# Altium PCB Apollo_Main_Board_1 8.PcbDoc (part 4 of 4)
Units mil, origin at the board's own origin, x right, y up, seen from the top; angles counter-clockwise.
Board outline 984.25 x 629.92 mil, 6 copper layers (Top, Inner Layer 2, Inner Layer 3, Inner Layer 4, Inner Layer 5, Bottom), stack 5.16 mil thick; 125 components, 112 nets, 514 pads, 2007 vias.
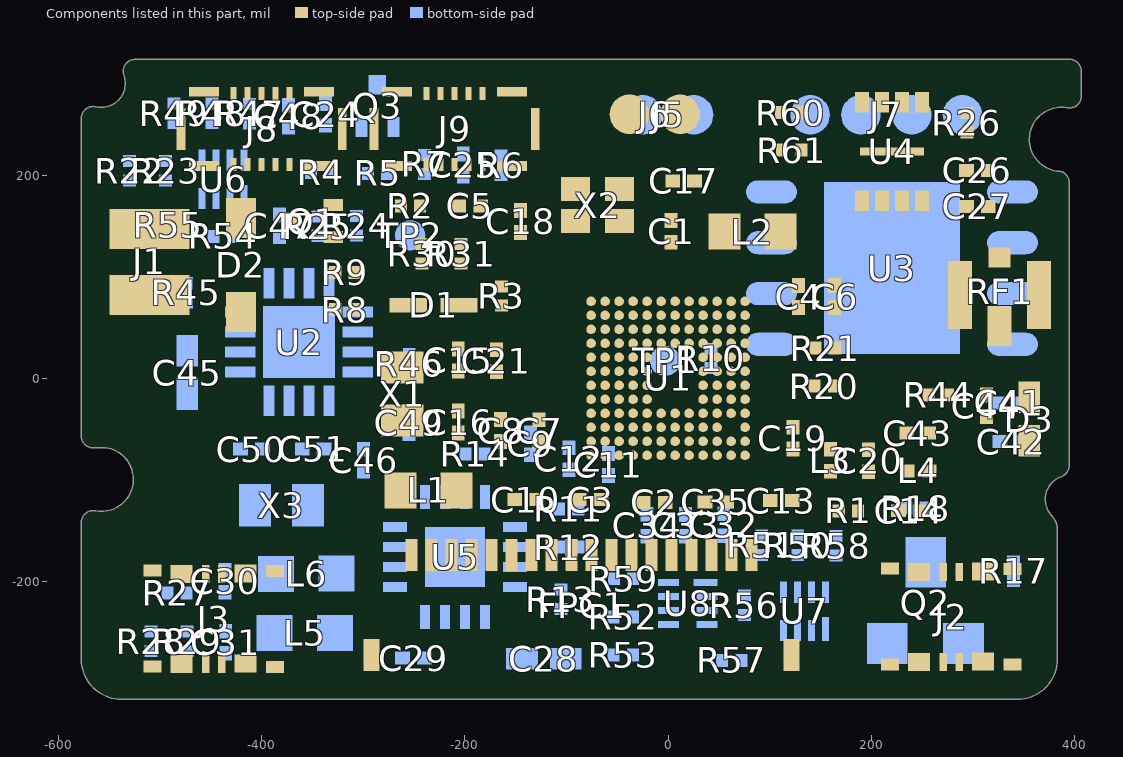
[diagram p8: the components of this part, seen from the top]

## Other copper (continued)
Bottom:
  region net VCC_3V3: -242.13,-250 -216.54,-250 -216.54,-255.91 -131.89,-255.91 -131.89,-303.15 -190.94,-303.15 -206.69,-287.4 -242.13,-287.4 -242.13,-250
  region net SW2_VDD1V9: -206.69,297.24 -135.83,297.24 -135.83,248.03 -206.69,248.03 -206.69,297.24
  region net VCC_3V3: -437.01,299.21 -366.14,299.21 -366.14,263.78 -437.01,263.78 -437.01,299.21
  region net SW2_VDD1V9: -480.32,-204.72 -462.6,-204.72 -462.6,-253.94 -480.32,-253.94 -480.32,-204.72
  region net SW2_VDD1V9: 289.37,240.16 289.37,289.37 294.29,294.29 328.74,294.29 328.74,240.16 289.37,240.16
  region net SW2_VDD1V9: -370.08,139.76 -370.08,179.13 -289.37,179.13 -277.56,190.94 -277.56,253.94 -251.97,253.94 -251.97,198.82 -238.19,198.82 -238.19,183.07 -141.73,183.07 -141.73,251.97 -100.39,251.97 -100.39,177.17 -131.89,145.67 -198.82,145.67 -198.82,-45.28 -240.16,-45.28 -240.16,-35.43 -263.78,-35.43 -263.78,5.91 -228.35,5.91 -228.35,147.64 -246.06,165.35 -291.34,165.35 -302.17,154.53 -356.3,154.53 -356.3,141.73 -363.19,134.84 -372.05,134.84 -372.05,139.76 -370.08,139.76
  region net NETQ2_1: 303.15,-194.88 340.55,-194.88 340.55,-212.6 311.02,-242.13 311.02,-271.65 279.53,-271.65 279.53,-218.5 303.15,-194.88
  region net SW2_VDD1V9: 131.89,-51.18 220.47,-51.18 220.47,-9.84 248.03,-9.84 248.03,-84.65 196.85,-84.65 196.85,-96.46 47.24,-96.46 47.24,-53.15 131.89,-53.15 131.89,-51.18
  region net SW2_VDD1V9: -330.71,-7.87 -250,-7.87 -250,-29.53 -330.71,-29.53 -330.71,-7.87

## Silkscreen, mask and mechanical layers (free items; w line width, h text height)
Silkscreen Top:
  circle w2.95: c-114.17,-92.52 r7.1
  circle w2.95: c250,293.31 r8.35
  lines w0.1: 102.06,-203.22 112.06,-188.22 122.06,-203.22 102.06,-203.22
  text "-" at -466.54,291.34 h19.68
  text "+" at -352.36,289.37 h19.68
  text "-" at -273.62,289.37 h19.68
  text "+" at -159.45,289.37 h19.68
  text "RX" at -114.17,240.16 h19.68
  text "TX" at 51.18,240.16 h19.68
  text "1" at -452.76,169.29 h19.68
  text "1" at -295.28,165.35 h19.68
  text "1" at -458.66,-171.26 h19.68
  text "1" at 267.72,-173.23 h19.68
  text "18" at -336.61,-175.2 h19.68
  text "1" at 147.64,-188.98 h19.68
Silkscreen Bottom:
  text "GND" at 147.64,212.6 h13.78
  text "CLK" at 208.66,210.63 h15.75
  text "DID" at 257.87,210.63 h15.75
  text "VDD" at 322.83,210.63 h15.75
  text "RST" at -35.43,179.13 h17.72 r270
  text "GND" at 13.78,177.17 h17.72 r270
  text "Apollo_Main_Board_V1" at 55.12,76.77 h17.72
Solder Mask Top:
  region: 448.4,236.22 ccw(c393.7,236.22) 393.7,290.92 ccw(c393.7,236.22) 339.01,236.22 ccw(c393.7,236.22) 393.7,181.53 ccw(c393.7,236.22)
  region: -496.49,-98.43 ccw(c-551.18,-98.43) -551.18,-43.73 ccw(c-551.18,-98.43) -605.88,-98.43 ccw(c-551.18,-98.43) -551.18,-153.12 ccw(c-551.18,-98.43)
  region: -494.52,287.4 ccw(c-549.21,287.4) -549.21,342.1 ccw(c-549.21,287.4) -603.91,287.4 ccw(c-549.21,287.4) -549.21,232.71 ccw(c-549.21,287.4)
Solder Mask Bottom:
  region: -502.74,289.37 ccw(c-562.99,289.37) -562.99,349.63 ccw(c-562.99,289.37) -623.25,289.37 ccw(c-562.99,289.37) -562.99,229.11 ccw(c-562.99,289.37)
  region: -490.92,-100.39 ccw(c-551.18,-100.39) -551.18,-40.14 ccw(c-551.18,-100.39) -611.44,-100.39 ccw(c-551.18,-100.39) -551.18,-160.65 ccw(c-551.18,-100.39)
  region: 291.34,-92.52 397.64,-92.52 397.64,-149.61 291.34,-149.61 291.34,-92.52
Mechanical 1:
  circle w0.5: c394.96,-154.45 r11.81
  lines w0.5: -563.53,-130.31 -563.53,-130.31 ; -535.53,298.3 -535.53,298.3 ; 382.83,204.1 382.87,204.1 382.83,204.1 ; 392.81,266.28 392.81,266.28
Mechanical 5:
  circle w0.5: c394.89,-154.55 r11.81
  lines w0.5: -563.11,267.3 -563.11,267.3 ; -535.59,298.2 -535.59,298.2 ; 382.77,204 382.8,204 382.77,204 ; 392.75,266.18 392.75,266.18
Mechanical 6:
  lines w0.5: -498.85,-289.2 -516.57,-289.2 -516.57,-277.38 -498.85,-277.38 ; -498.85,-194.71 -516.57,-194.71 -516.57,-182.9 -498.85,-182.9 ; -498.72,-290.12 -516.44,-290.12 -516.44,-278.31 -498.72,-278.31 ; -498.72,-195.64 -516.44,-195.64 -516.44,-183.83 -498.72,-183.83 ; -364.8,-285.26 -530.15,-285.26 -530.15,-186.83 -364.8,-186.83 ; -364.67,-286.19 -530.02,-286.19 -530.02,-187.76 -364.67,-187.76 ; -301.81,-180.93 -301.81,-295.1 131.27,-295.1 131.27,-180.93 ; -301.68,-181.86 -301.68,-296.03 131.4,-296.03 131.4,-181.86 ; 195.96,-284.22 361.32,-284.22 361.32,-185.79 195.96,-185.79 ; -535.63,298.28 -535.63,298.28 ; 377.68,-135.25 377.68,-135.25 ; 382.73,204.08 382.76,204.08 382.73,204.08 ; 386.98,-96.77 386.98,-96.77
Mechanical 15:
  lines w0.1: 95.56,-201.22 105.56,-186.22 115.56,-201.22 95.56,-201.22